# Altium PCB mojo_cnc_shield.pcbdoc
Units mil, origin at the board's own origin, x right, y up, seen from the top; angles counter-clockwise.
Board outline 5990 x 5670 mil, 2 copper layers (Top Layer, Bottom Layer); 90 components, 189 nets, 485 pads, 0 vias.
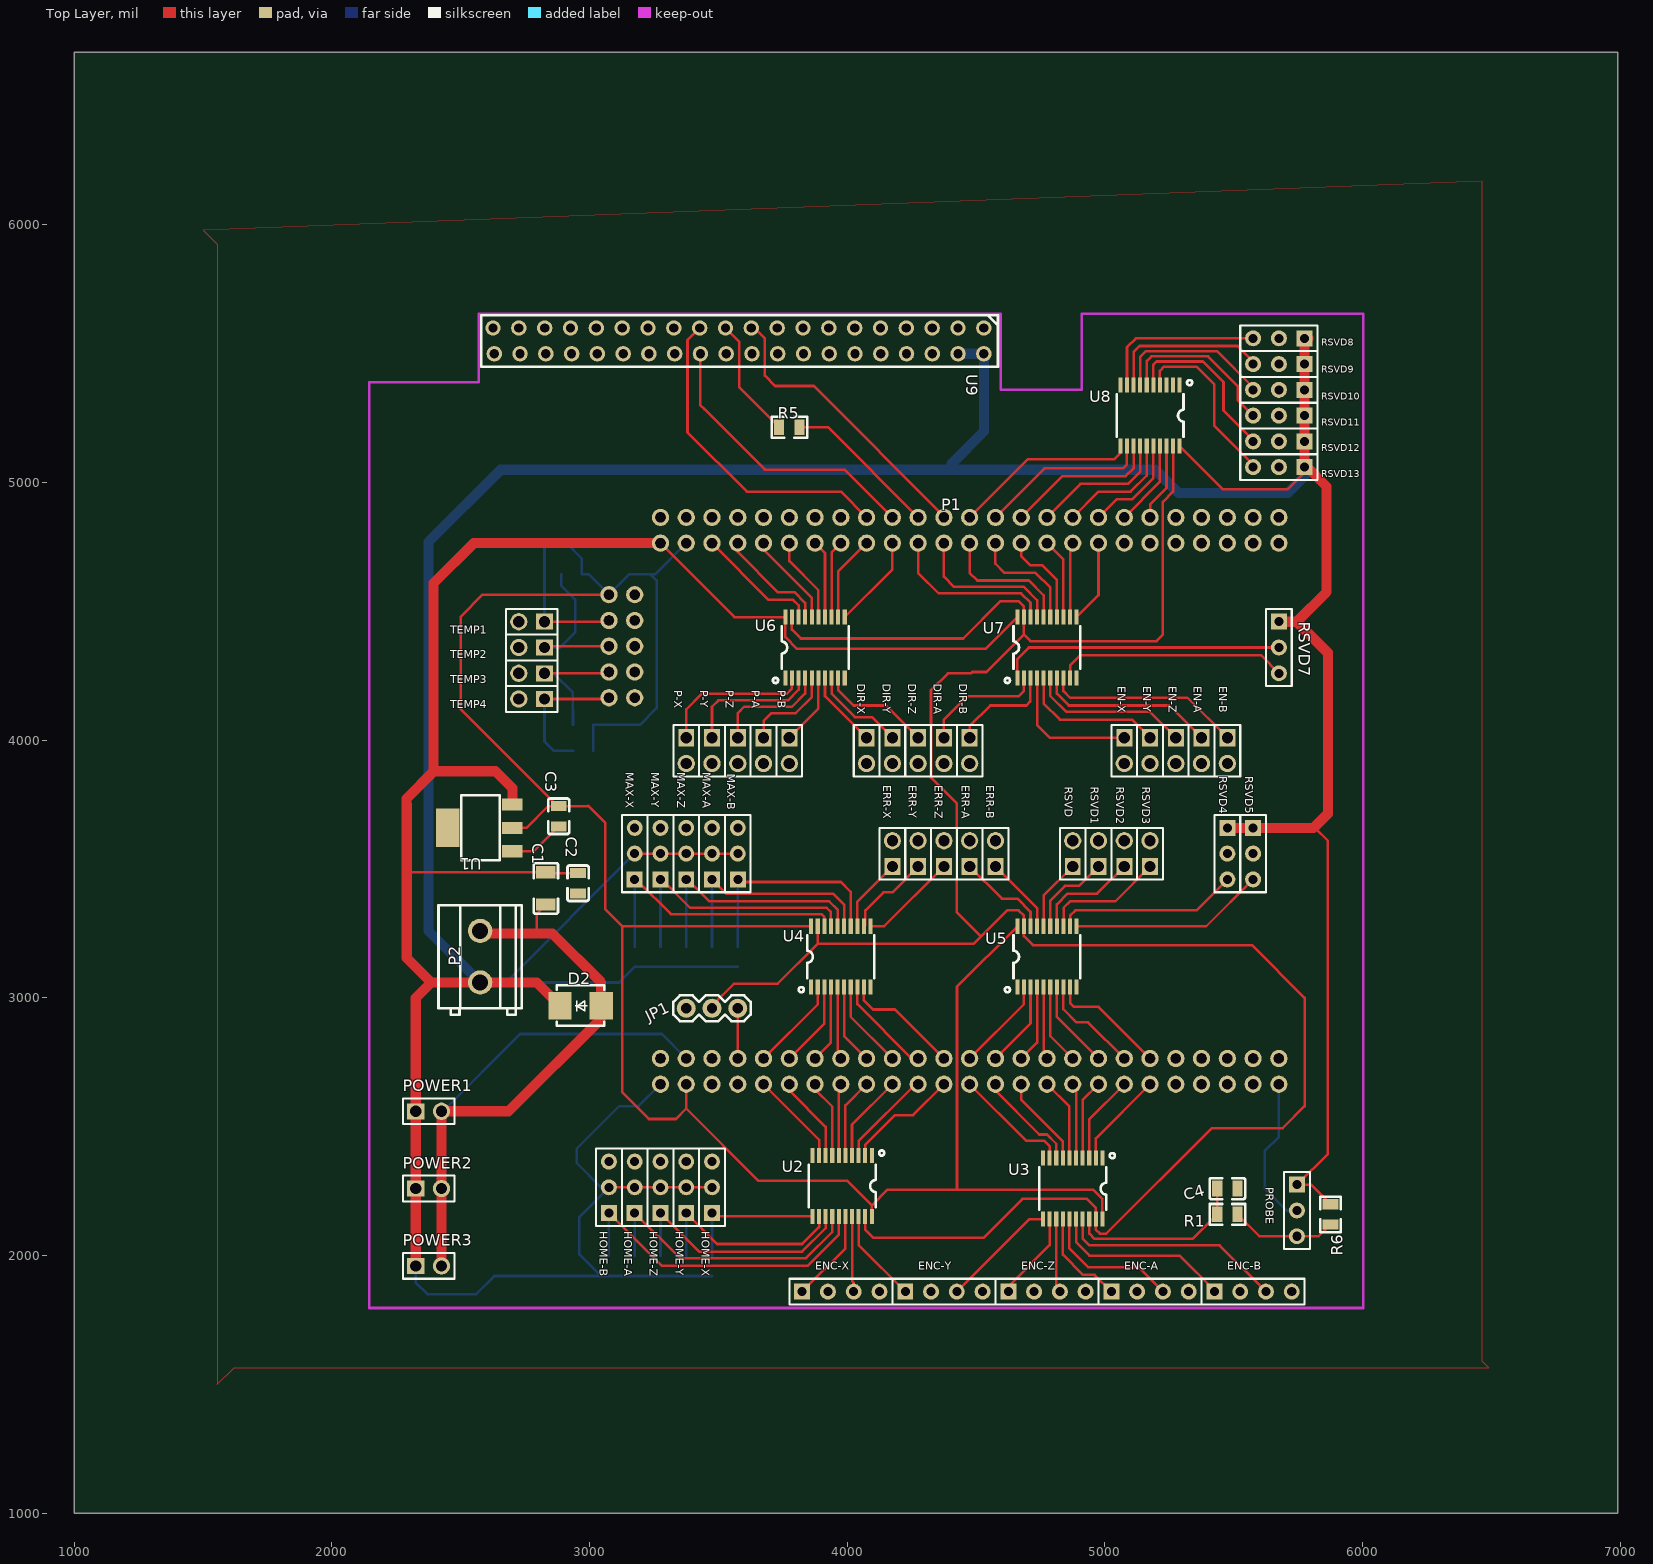
[diagram p0: Top Layer view]
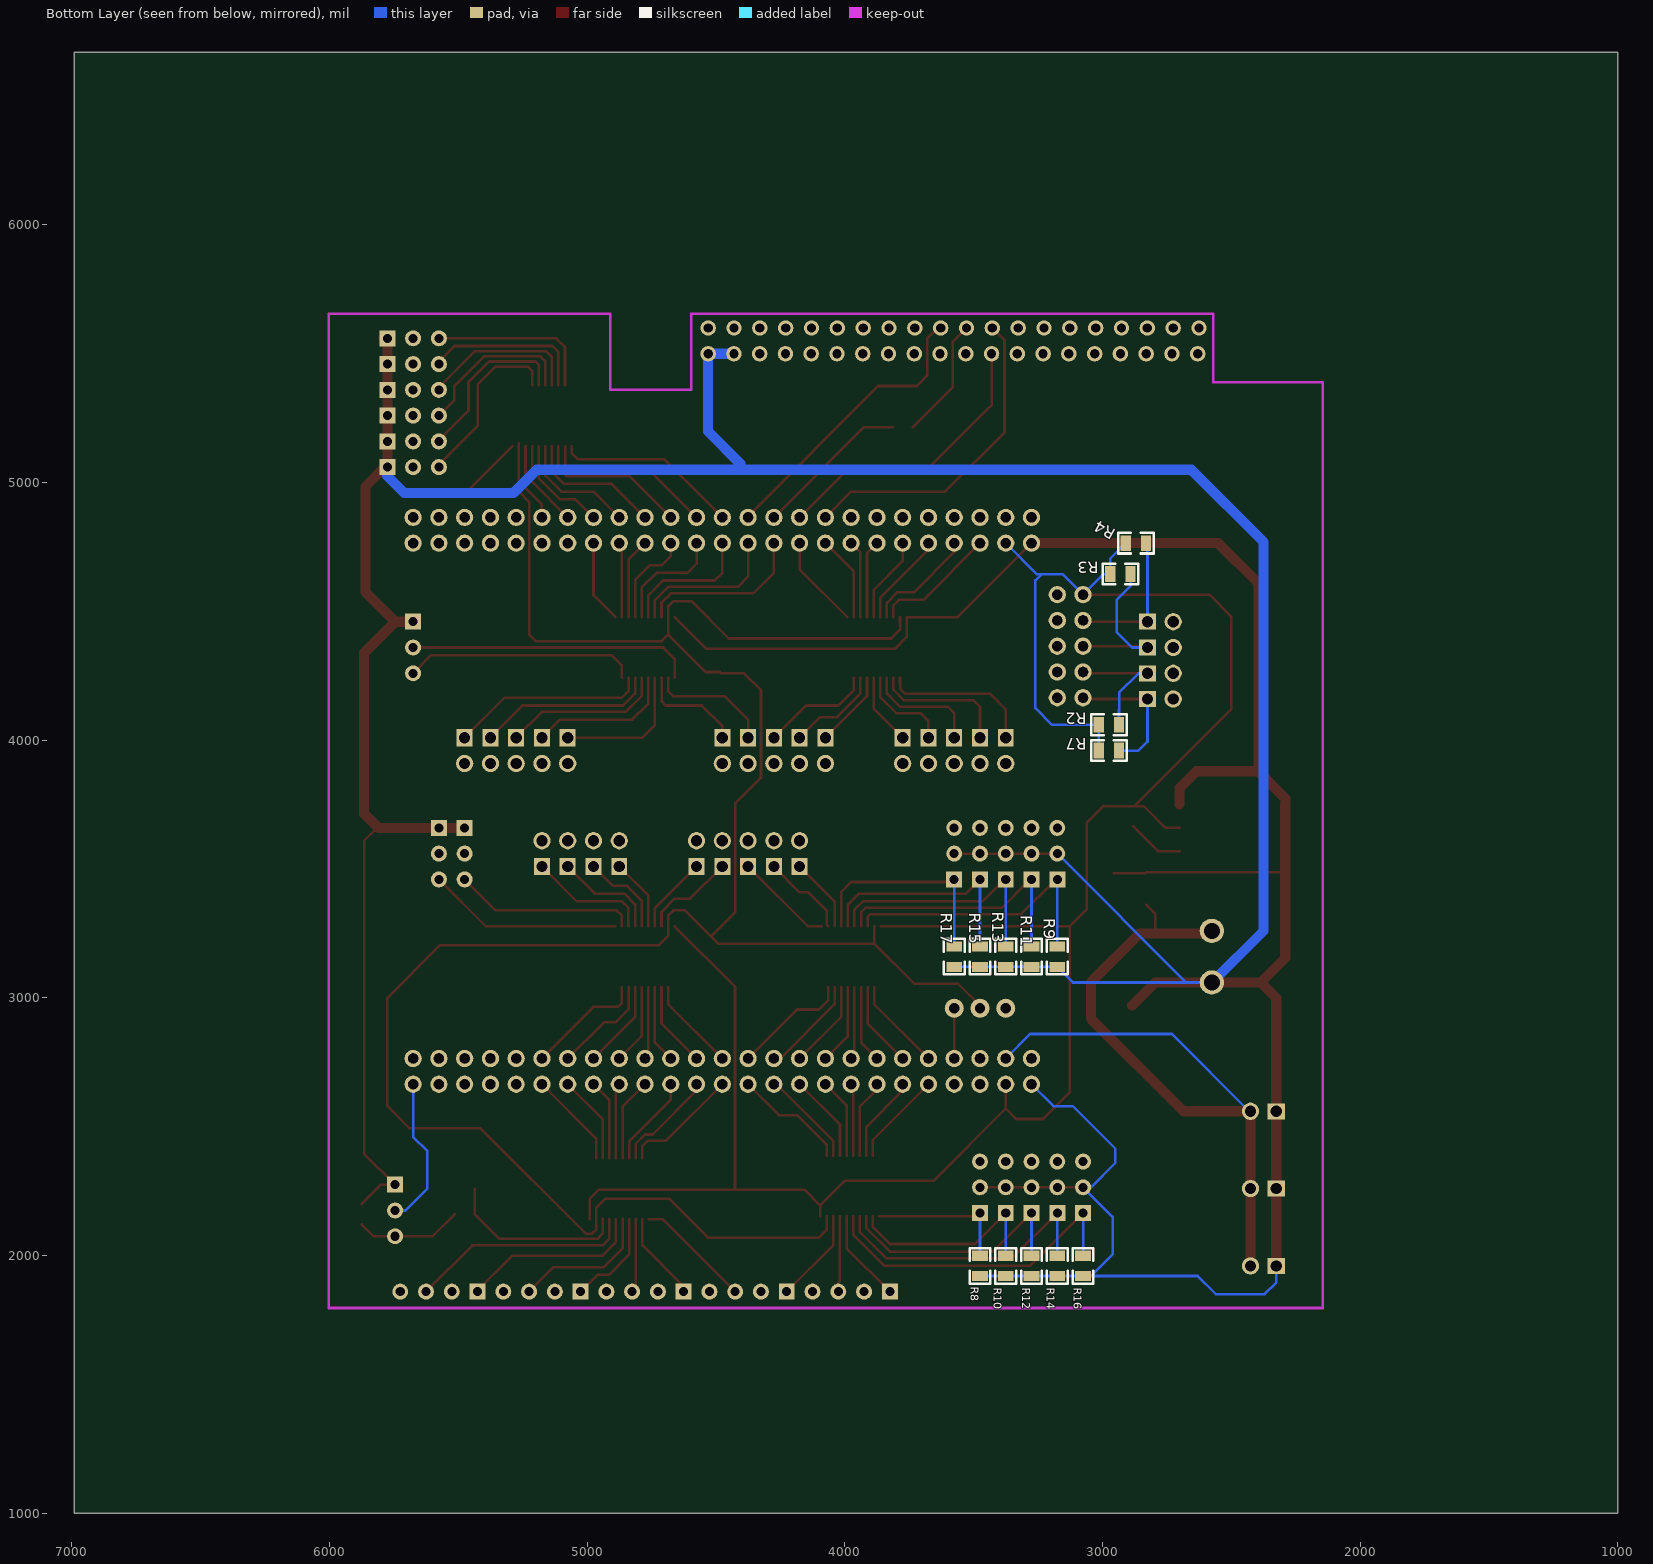
[diagram p1: Bottom Layer view, seen from below]

## Layer stack, top to bottom
Top Layer: signal copper (thickness not stored)
Dielectric: dielectric 12.6, FR-4, Dk 4.8
Bottom Layer: signal copper (thickness not stored)

## Board outline
6990,1000 1000,1000 1000,6670 6990,6670

## Components (designator, comment, footprint, x,y, rotation, side; value= is the part's Value field where it differs from the comment)
C1 "16v/10uF" C1206 2830,3425 r270 top
C2 "0.1uF" C0805 2955,3445 r270 top
C3 "0.1uF" C0805 2880,3705 r270 top
C4 "0.01u" C0805 5475,2260 r0 top
D2 "SMBJ5.0A" SMB_L4.6-W3.6-LS5.3-R-RD 2965,2970 r0 top
DIR-A "5264-2P" HDR-M-2.54_1X2 4375,3960 r270 top
DIR-B "5264-2P" HDR-M-2.54_1X2 4475,3960 r270 top
DIR-X "5264-2P" HDR-M-2.54_1X2 4075,3960 r270 top
DIR-Y "5264-2P" HDR-M-2.54_1X2 4175,3960 r270 top
DIR-Z "5264-2P" HDR-M-2.54_1X2 4275,3960 r270 top
EN-A "5264-2P" HDR-M-2.54_1X2 5375,3960 r270 top
EN-B "5264-2P" HDR-M-2.54_1X2 5475,3960 r270 top
EN-X "5264-2P" HDR-M-2.54_1X2 5075,3960 r270 top
EN-Y "5264-2P" HDR-M-2.54_1X2 5175,3960 r270 top
EN-Z "5264-2P" HDR-M-2.54_1X2 5275,3960 r270 top
ENC-A "5264-04A" HDR-M-2.54_1X4 5175,1860 r0 top
ENC-B "5264-04A" HDR-M-2.54_1X4 5575,1860 r0 top
ENC-X "5264-04A" HDR-M-2.54_1X4 3975,1860 r0 top
ENC-Y "5264-04A" HDR-M-2.54_1X4 4375,1860 r0 top
ENC-Z "5264-04A" HDR-M-2.54_1X4 4775,1860 r0 top
ERR-A "5264-2P" HDR-M-2.54_1X2 4475,3560 r90 top
ERR-B "5264-2P" HDR-M-2.54_1X2 4575,3560 r90 top
ERR-X "5264-2P" HDR-M-2.54_1X2 4175,3560 r90 top
ERR-Y "5264-2P" HDR-M-2.54_1X2 4275,3560 r90 top
ERR-Z "5264-2P" HDR-M-2.54_1X2 4375,3560 r90 top
HOME-A "5264-3P" HDR-M-2.54_1X3 3175,2265 r90 top
HOME-B "5264-3P" HDR-M-2.54_1X3 3075,2265 r90 top
HOME-X "5264-3P" HDR-M-2.54_1X3 3475,2265 r90 top
HOME-Y "5264-3P" HDR-M-2.54_1X3 3375,2265 r90 top
HOME-Z "5264-3P" HDR-M-2.54_1X3 3275,2265 r90 top
JP1 "JUMPER-3PTH" 1X03 3475,2960 r0 top
MAX-A "5264-3P" HDR-M-2.54_1X3 3475,3560 r90 top
MAX-B "5264-3P" HDR-M-2.54_1X3 3575,3560 r90 top
MAX-X "5264-3P" HDR-M-2.54_1X3 3175,3560 r90 top
MAX-Y "5264-3P" HDR-M-2.54_1X3 3275,3560 r90 top
MAX-Z "5264-3P" HDR-M-2.54_1X3 3375,3560 r90 top
P1 "MOJO" MOJO 4375,3765 r0 top
P2 "CONN-TH_2P-P5.08" CONN-TH_2P-P5.08 2575,3160 r90 top
P-A "5264-2P" HDR-M-2.54_1X2 3675,3960 r270 top
P-B "5264-2P" HDR-M-2.54_1X2 3775,3960 r270 top
P-X "5264-2P" HDR-M-2.54_1X2 3375,3960 r270 top
P-Y "5264-2P" HDR-M-2.54_1X2 3475,3960 r270 top
P-Z "5264-2P" HDR-M-2.54_1X2 3575,3960 r270 top
POWER1 "5264-2P" HDR-M-2.54_1X2 2375,2560 r0 top
POWER2 "5264-2P" HDR-M-2.54_1X2 2375,2260 r0 top
POWER3 "5264-2P" HDR-M-2.54_1X2 2375,1960 r0 top
PROBE "5264-3P" HDR-M-2.54_1X3 5745,2175 r270 top
R1 "100Ω" R0805#1 5474.97,2160 r180 top
R2 "4700Ω" R0805#2 2974.97,4060 r180 bottom
R3 "4700Ω" R0805#2 2929.97,4645 r180 bottom
R4 "4700Ω" R0805#2 2869.97,4765 r180 bottom
R5 "80Ω" R0805#1 3775,5215 r180 top
R6 "4700Ω" R0805#1 5874.97,2160 r90 top
R7 "4700Ω" R0805#2 2974.97,3960 r180 bottom
R8 "4700Ω" R0805#2 3474.97,1960 r270 bottom
R9 "4700Ω" R0805#2 3174.97,3160 r270 bottom
R10 "4700Ω" R0805#2 3374.97,1960 r270 bottom
R11 "4700Ω" R0805#2 3274.97,3160 r270 bottom
R12 "4700Ω" R0805#2 3274.97,1960 r270 bottom
R13 "4700Ω" R0805#2 3374.97,3160 r270 bottom
R14 "4700Ω" R0805#2 3174.97,1960 r270 bottom
R15 "4700Ω" R0805#2 3474.97,3160 r270 bottom
R16 "4700Ω" R0805#2 3074.97,1960 r270 bottom
R17 "4700Ω" R0805#2 3574.97,3160 r270 bottom
RSVD "5264-2P" HDR-M-2.54_1X2 4875,3560 r90 top
RSVD1 "5264-2P" HDR-M-2.54_1X2 4975,3560 r90 top
RSVD2 "5264-2P" HDR-M-2.54_1X2 5075,3560 r90 top
RSVD3 "5264-2P" HDR-M-2.54_1X2 5175,3560 r90 top
RSVD4 "5264-3P" HDR-M-2.54_1X3 5475,3560 r270 top
RSVD5 "5264-3P" HDR-M-2.54_1X3 5575,3560 r270 top
RSVD7 "5264-3P" HDR-M-2.54_1X3 5675,4360 r270 top
RSVD8 "5264-3P" HDR-M-2.54_1X3 5675,5560 r180 top
RSVD9 "5264-3P" HDR-M-2.54_1X3 5675,5460 r180 top
RSVD10 "5264-3P" HDR-M-2.54_1X3 5675,5360 r180 top
RSVD11 "5264-3P" HDR-M-2.54_1X3 5675,5260 r180 top
RSVD12 "5264-3P" HDR-M-2.54_1X3 5675,5160 r180 top
RSVD13 "5264-3P" HDR-M-2.54_1X3 5675,5060 r180 top
TEMP1 "5264-2P" HDR-M-2.54_1X2 2775,4460 r180 top
TEMP2 "5264-2P" HDR-M-2.54_1X2 2775,4360 r180 top
TEMP3 "5264-2P" HDR-M-2.54_1X2 2775,4260 r180 top
TEMP4 "5264-2P" HDR-M-2.54_1X2 2775,4160 r180 top
U1 "RC11173.3" SOT-223 2575,3660 r180 top
U2 "SN74LVC245APWR" TSSOP-20_L6.5-W4.4-P0.65-LS6.4-BL 3980,2270 r180 top
U3 "SN74LVC245APWR" TSSOP-20_L6.5-W4.4-P0.65-LS6.4-BL 4875,2260 r180 top
U4 "SN74LVC245APWR" TSSOP-20_L6.5-W4.4-P0.65-LS6.4-BL 3975,3160 r0 top
U5 "SN74LVC245APWR" TSSOP-20_L6.5-W4.4-P0.65-LS6.4-BL 4775,3160 r0 top
U6 "SN74HCT245PWR" TSSOP-20_L6.5-W4.4-P0.65-LS6.4-BL 3875,4360 r0 top
U7 "SN74HCT245PWR" TSSOP-20_L6.5-W4.4-P0.65-LS6.4-BL 4775,4360 r0 top
U8 "SN74HCT245PWR" TSSOP-20_L6.5-W4.4-P0.65-LS6.4-BL 5175,5260 r180 top
U9 "树莓派40pin-IO" 树莓派40PIN-IO 4530,5600 r270 top

## Footprints (in the part's own frame and the unit in brackets; to place one, negate y for a bottom-side part, rotate by r counter-clockwise, add the part's x,y. Pads: shape width x height; smd on the part's side, far side on the other; paste and mask are expansions set on the pad)
1X03 [mil]
  round 74 hole 40: 1(-100,0) 2(0,0) 3(100,0)
  silkscreen extent -150,-50 150,50
C0805 [mm]
  rect 1x1.55 smd: 1(-1,0) 2(1,0)
  silkscreen extent -1.75,-1.04 1.75,1.04
C1206 [mm]
  rect 1.2x1.9 smd: 1(-1.6,0) 2(1.6,0)
  silkscreen extent -2.5,-1.2 2.5,1.2
CONN-TH_2P-P5.08 [mm]
  round 2.4 hole 1.6: 1(-2.54,0) 2(2.54,0)
  silkscreen extent -5.71,-4.1 5.08,4.1
HDR-M-2.54_1X2 [mm]
  rect 1.7x1.575 hole 1.1: 1(-1.27,0)
  round 1.7 hole 1.1: 2(1.27,0)
  silkscreen extent -2.54,-1.27 2.54,1.27
HDR-M-2.54_1X3 [mil]
  rect 62x62 hole 35: 1(-100,0)
  round 62 hole 35: 2(0,0) 3(100,0)
  silkscreen extent -150,-50 150,50
HDR-M-2.54_1X4 [mil]
  rect 62x62 hole 35: 1(-150,0)
  round 62 hole 35: 2(-50,0) 3(50,0) 4(150,0)
  silkscreen extent -200,-50 200,50
MOJO [mil]
  round 66.93 hole 39.36: 1(500.01,1000) 2(500.01,1100) 5(400.01,1000) 6(400.01,1100) 7(300.01,1000) 8(300.01,1100) 9(200.01,1000) 10(200.01,1100) 11(100.01,1000) 12(100.01,1100) 14(0.01,1000) 15(0.01,1100) 16(-99.99,1000) 17(-99.99,1100) 21(-199.99,1000) 22(-199.99,1100) 23(-299.99,1000) 24(-299.99,1100) 26(-399.99,1000) 27(-399.99,1100) 29(-499.99,1000) 30(-499.99,1100) 32(-599.99,1000) 33(-599.99,1100) 34(-699.99,1000) 35(-699.99,1100) 40(-799.99,1000) 41(-799.99,1100) 50(-899.99,1000) 51(-899.99,1100) 57(-799.99,-1100) 58(-799.99,-1000) 66(-699.99,-1100) 67(-699.99,-1000) 74(-599.99,-1100) 75(-599.99,-1000) 78(-499.99,-1100) 79(-499.99,-1000) 80(-399.99,-1100) 81(-399.99,-1000) 82(-299.99,-1100) 83(-299.99,-1000) 84(-199.99,-1100) 85(-199.99,-1000) 87(-99.99,-1100) 88(-99.99,-1000) 92(0.01,-1100) 93(0.01,-1000) 94(100.01,-1100) 95(100.01,-1000) 97(200.01,-1100) 98(200.01,-1000) 99(300.01,-1100) 100(300.01,-1000) 101(400.01,-1100) 102(400.01,-1000) 104(500.01,-1100) 105(500.01,-1000) 111(600.01,-1100) 112(600.01,-1000) 114(700.01,-1100) 115(700.01,-1000) 116(800.01,-1100) 117(800.01,-1000) 118(900.01,-1100) 119(900.01,-1000) 120(1000.01,-1100) 121(1000.01,-1000) 123(1299.99,1000) 124(1299.99,1100) 126(1199.99,1000) 127(1199.99,1100) 131(1099.99,1000) 132(1099.99,1100) 133(1000.01,1000) 134(1000.01,1100) 137(900.01,1000) 138(900.01,1100) 139(800.01,1000) 140(800.01,1100) 141(700.01,1000) 142(700.01,1100) 143(600.01,1000) 144(600.01,1100) +V(-999.99,-1100) +V(-999.99,1000) A0(-1199.99,400) A1(-1299.99,400) A4(-1199.99,500) A5(-1299.99,500) A6(-1199.99,600) A7(-1299.99,600) A8(-1199.99,700) A9(-1299.99,700) AREF(-1299.99,800) DONE(-899.99,-1100) GND(-1199.99,800) GND(-1099.99,-1000) GND(-1099.99,1100) GND(-999.99,-1000) GND(-999.99,1100) GND(1299.99,-1100) RAW(-1099.99,-1100) RAW(-1099.99,1000) RST(1299.99,-1000) SUS(-899.99,-1000) TCK(1199.99,-1100) TDI(1199.99,-1000) TDO(1099.99,-1100) TMS(1099.99,-1000)
R0805#1 [mm]
  rect 1x1.55 smd: 1(-1,0) 2(1,0)
  silkscreen extent -1.75,-1.02 1.75,1.02
R0805#2 [mm]
  rect 1x1.55 smd: 1(1,0) 2(-1,0)
  silkscreen extent -1.75,-1.02 1.75,1.02
SMB_L4.6-W3.6-LS5.3-R-RD [mm]
  rect 2.29x2.72 smd: 1(2.025,0) 2(-2.025,0)
  silkscreen extent -2.35,-2 2.35,2
SOT-223 [mm]
  rect 2x1.2 smd: 1(-3.175,2.3) 2(-3.175,0) 3(-3.175,-2.3)
  rect 2.3x3.8 smd: 4(3.175,0)
  silkscreen extent -1.93,-3.2 1.87,3.2
TSSOP-20_L6.5-W4.4-P0.65-LS6.4-BL [mm]
  rect 0.4x1.494 smd: 1(-2.925,-3.001) 2(-2.275,-3.001) 3(-1.625,-3.001) 4(-0.975,-3.001) 5(-0.325,-3.001) 6(0.324,-3.001) 7(0.975,-3.001) 8(1.625,-3.001) 9(2.275,-3.001) 10(2.925,-3.001) 11(2.925,3.001) 12(2.275,3.001) 13(1.625,3.001) 14(0.975,3.001) 15(0.325,3.001) 16(-0.325,3.001) 17(-0.975,3.001) 18(-1.625,2.996) 19(-2.275,2.996) 20(-2.925,3.001)
  silkscreen extent -4.15,-3.5 3.3,2.1
树莓派40PIN-IO [mil]
  round 60 hole 36: 1(0,0) 2(100,0) 3(0,-100.26) 4(100,-100) 5(0,-200.53) 6(100,-200) 7(0,-300.79) 8(100,-300) 9(0,-401.05) 10(100,-400) 11(0,-501.32) 12(100,-500) 13(0,-601.58) 14(100,-600) 15(0,-701.84) 16(100,-700) 17(0,-802.11) 18(100,-800) 19(0,-902.37) 20(100,-900) 21(0,-1002.63) 22(100,-1000) 23(0,-1102.89) 24(100,-1100) 25(0,-1203.16) 26(100,-1200) 27(0,-1303.42) 28(100,-1300) 29(0,-1403.68) 30(100,-1400) 31(0,-1503.95) 32(100,-1500) 33(0,-1604.21) 34(100,-1600) 35(0,-1704.47) 36(100,-1700) 37(0,-1804.74) 38(100,-1800) 39(0,-1905) 40(100,-1900)
  silkscreen extent -50,-1950 150,55

## Nets (pads, with @x,y where several pads share a name; then routed paths per layer and width w, separated by ;. In a path a pad name is that pad's centre, name@x,y a point inside that pad or via, vN(x,y) a via of type N, cw(c..) or ccw(c..) an arc to the next point about the centre after c; other vN are vias at no path point)
+3V3: C3.1 P1.+V P1.AREF R2.2 R3.2 R4.2 R7.2 U1.2 U2.20 U3.20 U4.20 U5.20 | length 8756
  Top Layer w10: U1.2 2755,3660 2839.37,3744.37 C3.1 2875.63,3744.37 2500,4120 2500,4480 2585,4565 P1.AREF ; C3.1 2995,3745 3060,3680 3060,3345 3126.9,3278.1 ; P1.+V@3375.01,2665 3375.01,2569.99 ; U4.20@3859.8,3278.1 3126.9,3278.1 ; U2.20 4095.16,2195.16 ; 4425.8,2255 4425.8,3044.1 U5.20@4659.8,3278.1 ; U3.20 4990.16,2219.84 4955,2255 4155,2255 4095.16,2195.16 ; 3126.9,3278.1 3126.9,2633.1 3230,2530 3335.02,2530 3375.01,2569.99 ; 3375.01,2569.99 3655,2290 4000.32,2290 4095.16,2195.16
  Bottom Layer w10: R4.2@2909.37,4765 2969.37,4705 2969.37,4645 2995.01,4645 P1.AREF 3155.01,4645 3255.01,4645 P1.+V@3375.01,4765 ; R7.2@3014.37,3960 3014.37,4060 3195,4060 3260,4125 3260,4620 3240.11,4639.89 3240.11,4645
+5V: C1.1 C2.1 D2.2 HOME-A.2 HOME-B.2 HOME-X.2 HOME-Y.2 HOME-Z.2 MAX-A.2 MAX-B.2 MAX-X.2 MAX-Y.2 MAX-Z.2 P1.RAW P2.1 POWER1.1 POWER2.1 POWER3.1 PROBE.1 R6.2 R8.1 R9.1 R10.1 R11.1 R12.1 R13.1 R14.1 R15.1 R16.1 R17.1 RSVD4.1 RSVD5.1 RSVD7.1 RSVD8.1 RSVD9.1 RSVD10.1 RSVD11.1 RSVD12.1 RSVD13.1 U1.3 U6.20 U7.20 U8.20 U9.2 U9.4 | length 22622.4
  Top Layer w10: 2290,3502.56 2304.57,3487.99 C1.1 2833.62,3484.37 C2.1 ; HOME-B.2 HOME-A.2 HOME-Z.2 HOME-Y.2 HOME-X.2 ; MAX-X.2 MAX-Y.2 MAX-Z.2 MAX-A.2 MAX-B.2 ; P1.RAW@3275.01,4765 3561.86,4478.15 U6.20 ; U6.20@3759.8,4478.1 3759.8,4400.2 3805,4355 4536.7,4355 U7.20@4659.8,4478.1 ; U8.20 5457,4975 5710,4975 5770,5035 RSVD13.1@5770,5065 ; 5770,3660 5815,3660 5865,3610 5865,2395 PROBE.1 5799.37,2275 R6.2
  Top Layer w39.37: POWER3.1 POWER2.1 POWER1.1 2325,3000 2385,3060 ; U1.3@2700,3750.5 2700,3815 2635,3880 2394.4,3880 ; D2.2 2795.28,3060 P2.1 2385,3060 ; P1.RAW@3275.01,4765 2550,4765 2394.4,4609.4 2394.4,3880 ; RSVD4.1 RSVD5.1 5810,3660 5865,3715 5865,4340 5745,4460 ; RSVD7.1 5745,4460 ; RSVD13.1@5770,5065 5780,5065 5860,4985 5860,4575 5745,4460 ; RSVD13.1 RSVD12.1 RSVD11.1 RSVD10.1 RSVD9.1 5775,5545 RSVD8.1@5790,5560 ; 2385,3060 2290,3155 2290,3502.56 2290,3740.3 2289.8,3774.2 2394.4,3880
  Bottom Layer w10: POWER3.1 2325,1895 2370,1850 2560,1850 2630.63,1920.63 R16.1 ; P2.1 2675,3060 ; MAX-X.2 2675,3060 ; P1.RAW@3275.01,2665 3190.01,2580 3115,2580 2950,2415 2950,2360 3045,2265 HOME-B.2 2960,2150 2960,2005 3044.37,1920.63 R16.1 ; R8.1 R10.1 R12.1 R14.1 R16.1 ; R17.1 R15.1 R13.1 R11.1 R9.1 3114.37,3060 2675,3060
  Bottom Layer w39.37: P2.1 2375,3260 2375,4770 2655,5050 5195,5050 5285,4960 5710.1,4960 5775.2,5025.6 RSVD13.1 ; 4405.4,5050 4405.2,5073.4 4530,5198.2 4530,5295 U9.2 U9.4 U9.4@4425,5505
A0: P1.A0
A1: P1.A1 R7.1 TEMP4.1 | length 542.2
  Top Layer w10: TEMP4.1 3070.01,4160 P1.A1
  Bottom Layer w10: TEMP4.1 2825,3995 2860,3960 R7.1
A4: P1.A4
A5: P1.A5 R2.1 TEMP3.1 | length 518.1
  Top Layer w10: TEMP3.1 3070.01,4260 P1.A5
  Bottom Layer w10: TEMP3.1 2860,4260 2935,4185 R2.1
A6: P1.A6
A7: P1.A7 R3.1 TEMP2.1 | length 644.5
  Top Layer w10: TEMP2.1 2830,4365 P1.A7
  Bottom Layer w10: TEMP2.1 2885,4360 2945,4420 2945,4545 2890.63,4599.37 R3.1
A8: P1.A8
A9: P1.A9 R4.1 TEMP1.1 | length 559.4
  Top Layer w10: TEMP1.1 3070.01,4460 P1.A9
  Bottom Layer w10: TEMP1.1 2825,4759.37 R4.1
COM_SPICLK: P1.24 U9.23 | length 1256.2
  Top Layer w10: U9.23 3380,5552.9 3380,5195 3610,4965 3975,4965 P1.24
COM_SPICS: P1.22 U9.24 | length 1125.2
  Top Layer w10: U9.24 3430,5300 3445,5285 3680,5050 3990,5050 P1.22
COM_SPIIN: P1.15 U9.19 | length 1141.8
  Top Layer w10: U9.19 3640,5600 3680,5560 3680,5415 3720,5375 3870,5375 P1.15@4380,4865
COM_SPIOUT: R5.2 U9.21 | length 471.3
  Top Layer w10: U9.21 3580,5547.4 3580,5370.63 R5.2
DIR-A: DIR-A.1 U7.2 | length 477.6
  Top Layer w10: DIR-A.1 4375,4080 4465,4170 4665,4170 4685.4,4190.4 U7.2
DIR-B: DIR-B.1 U7.3 | length 411.6
  Top Layer w10: DIR-B.1 4475,4055 4555,4135 4695,4135 4710,4150 4710,4240.82 U7.3@4711.03,4241.85
DIR-X: DIR-X.1 U6.7 | length 298.8
  Top Layer w10: U6.7@3913.38,4241.85 3913.38,4171.62 DIR-X.1
DIR-Y: DIR-Y.1 U6.8 | length 367.7
  Top Layer w10: U6.8 3939,4181 4030,4090 4095,4090 DIR-Y.1
DIR-Z: DIR-Z.1 U6.9 | length 433.7
  Top Layer w10: U6.9@3964.56,4241.85 3964.56,4195.44 4025,4135 4150,4135 DIR-Z.1
ENABLE-A: EN-A.1 U7.7 | length 692.9
  Top Layer w10: U7.7@4813.38,4241.85 4813.38,4181.62 4860,4135 5250,4135 EN-A.1
ENABLE-B: EN-B.1 U7.8 | length 761.8
  Top Layer w10: U7.8@4838.97,4241.85 4838.97,4191.03 4865,4165 5320,4165 EN-B.1
ENABLE-X: EN-X.1 U7.4 | length 541.9
  Top Layer w10: U7.4@4736.62,4241.85 4736.62,4058.38 4785,4010 EN-X.1
ENABLE-Y: EN-Y.1 U7.5 | length 566.9
  Top Layer w10: U7.5@4762.2,4241.85 4762.2,4142.8 4825,4080 5105,4080 EN-Y.1
ENABLE-Z: EN-Z.1 U7.6 | length 624.1
  Top Layer w10: U7.6@4787.74,4241.85 4787.74,4172.26 4850,4110 5175,4110 EN-Z.1
ENCODER-A-A: ENC-A.1 U3.14 | length 386.2
  Top Layer w10: U3.14 4836.6,2003.4 4915,1925 4960,1925 ENC-A.1
ENCODER-A-B: ENC-B.1 U3.16 | length 716.4
  Top Layer w10: U3.16 4887.8,2052.2 4940,2000 5290,2000 5430,1860 ENC-B.1@5435,1860
ENCODER-A-X: ENC-X.1 U2.16 | length 361.3
  Top Layer w10: ENC-X.1 3992.8,2027.8 U2.16
ENCODER-A-Y: ENC-Y.1 U2.18 | length 367
  Top Layer w10: U2.18 4043.98,2041.02 ENC-Y.1
ENCODER-A-Z: ENC-Z.1 U3.12 | length 348.2
  Top Layer w10: ENC-Z.1 4625,1880 4785.4,2040.4 U3.12
ENCODER-B-A: ENC-A.3 U3.15 | length 546.3
  Top Layer w10: U3.15 4862.2,2027.8 4935,1955 5130,1955 ENC-A.3
ENCODER-B-B: ENC-B.3 U3.17 | length 882.4
  Top Layer w10: U3.17 4913.4,2066.6 4940,2040 5445,2040 ENC-B.3 ENC-B.3@5635,1860
ENCODER-B-X: ENC-X.3 U2.17 | length 294.6
  Top Layer w10: U2.17 4020,2150.23 4020,1900 4025,1895 ENC-X.3
ENCODER-B-Y: ENC-Y.3 U3.11 | length 451.5
  Top Layer w10: ENC-Y.3 4706.8,2141.8 U3.11
ENCODER-B-Z: ENC-Z.3 U3.13 | length 287.6
  Top Layer w10: U3.13 4811.03,1873.97 ENC-Z.3
ERR-A: ERR-A.1 U5.18 | length 365
  Top Layer w10: ERR-A.1 4600,3385 4660,3385 4711.03,3333.97 U5.18
ERR-B: ERR-B.1 U5.17 | length 298.8
  Top Layer w10: ERR-B.1 4736.62,3348.38 U5.17
ERR-X: ERR-X.1 U4.13 | length 288.2
  Top Layer w10: U4.13 4038.98,3373.98 ERR-X.1
ERR-Y: ERR-Y.1 U4.12 | length 339.5
  Top Layer w10: U4.12 4070,3283.58 4070,3340 4140,3410 4175,3410 ERR-Y.1
ERR-Z: ERR-Z.1 U4.11 | length 380.9
  Top Layer w10: U4.11 4143.15,3278.15 ERR-Z.1
GND: C1.2 C2.2 C3.2 C4.2 D2.1 DIR-A.2 DIR-B.2 DIR-X.2 DIR-Y.2 DIR-Z.2 EN-A.2 EN-B.2 EN-X.2 EN-Y.2 EN-Z.2 ENC-A.2 ENC-A.4 ENC-B.2 ENC-B.4 ENC-X.2 ENC-X.4 ENC-Y.2 ENC-Y.4 ENC-Z.2 ENC-Z.4 ERR-A.2 ERR-B.2 ERR-X.2 ERR-Y.2 ERR-Z.2 HOME-A.3 HOME-B.3 HOME-X.3 HOME-Y.3 HOME-Z.3 JP1.1 MAX-A.3 MAX-B.3 MAX-X.3 MAX-Y.3 MAX-Z.3 P1.GND P2.2 P-A.2 P-B.2 P-X.2 P-Y.2 P-Z.2 POWER1.2 POWER2.2 POWER3.2 PROBE.2 RSVD1.2 RSVD2.2 RSVD3.2 RSVD4.2 RSVD5.2 RSVD7.2 RSVD8.2 RSVD9.2 RSVD10.2 RSVD11.2 RSVD12.2 RSVD13.2 RSVD.2 TEMP1.2 TEMP2.2 TEMP3.2 TEMP4.2 U1.1 U2.1 U2.10 U3.1 U3.10 U4.1 U4.10 U5.1 U5.10 U6.1 U6.10 U7.1 U7.10 U8.1 U8.10 U9.6 U9.9 U9.14 U9.20 U9.25 U9.30 U9.34 U9.39 | length 5216.5
  Top Layer w10: U1.1 2783.82,3569.45 C3.2 ; 2795,3250 2795,3327 C1.2 ; U7.1 4659.84,4314.84 4705,4360 RSVD7.2
  Top Layer w39.37: POWER3.2 POWER2.2 POWER1.2 2685,2560 3044.7,2919.7 D2.1 3044.7,3060.3 2855,3250 2585,3250 P2.2
  Bottom Layer w10: POWER1.2 2430,2560 2730,2860 3280,2860 P1.GND@3375,2765 ; P1.GND@5675,2665 5675,2460 5620,2405 5620,2260 5705,2175 PROBE.2
HOME-A: HOME-A.1 R14.2 U2.14 | length 1107.1
  Top Layer w10: HOME-A.1 3350,1990 3840,1990 3941.62,2091.62 U2.14
  Bottom Layer w10: R14.2 HOME-A.1
HOME-B: HOME-B.1 R16.2 U2.15 | length 1263
  Top Layer w10: HOME-B.1 3280,1960 3845,1960 3967.2,2082.2 U2.15
  Bottom Layer w10: R16.2 HOME-B.1
HOME-X: HOME-X.1 R8.2 U2.11 | length 560.9
  Top Layer w10: HOME-X.1 3488.16,2151.84 U2.11
  Bottom Layer w10: R8.2 HOME-X.1
HOME-Y: HOME-Y.1 R10.2 U2.12 | length 799.3
  Top Layer w10: HOME-Y.1 3495,2045 3825,2045 3890.44,2110.44 U2.12
  Bottom Layer w10: R10.2 HOME-Y.1
HOME-Z: HOME-Z.1 R12.2 U2.13 | length 952.3
  Top Layer w10: HOME-Z.1 3425,2015 3825,2015 3916.03,2106.03 U2.13
  Bottom Layer w10: R12.2 HOME-Z.1
JP1_3: JP1.3 P1.58 | length 195
  Top Layer w10: P1.58 JP1.3
MAX-A: MAX-A.1 R15.2 U4.15 | length 898
  Top Layer w10: MAX-A.1 3530,3405 3945,3405 3987.8,3362.2 U4.15
  Bottom Layer w10: R15.2 MAX-A.1
MAX-B: MAX-B.1 R17.2 U4.14 | length 833.4
  Top Layer w10: MAX-B.1@3590,3450 3975,3450 4013.4,3411.6 U4.14@4013.4,3278.1
  Bottom Layer w10: R17.2 MAX-B.1
MAX-X: MAX-X.1 R9.2 U4.18 | length 1074
  Top Layer w10: MAX-X.1@3190,3450 3315,3325 3900,3325 3911.03,3313.97 U4.18@3911.03,3277.95
  Bottom Layer w10: R9.2 MAX-X.1
MAX-Y: MAX-Y.1 R11.2 U4.17 | length 1010.8
  Top Layer w10: MAX-Y.1@3290,3450 3390,3350 3920,3350 3936.62,3333.38 U4.17@3936.62,3278.15
  Bottom Layer w10: R11.2 MAX-Y.1
MAX-Z: MAX-Z.1 R13.2 U4.16 | length 941.9
  Top Layer w10: MAX-Z.1@3390,3450 3465,3375 3930,3375 3962.2,3342.8 U4.16@3962.2,3278.15
  Bottom Layer w10: R13.2 MAX-Z.1
OE: JP1.2 U2.19 U3.19 U4.19 U5.19 U6.19 U7.19 U8.19 | length 9270.4
  Top Layer w10: JP1.2@3475,2955 3475,2970 3560,3055 3730,3055 3885,3210 ; U6.19@3785.4,4477.9 3785,4430 3820,4395 4450,4395 4595,4540 4665,4540 4685.4,4519.6 U7.19@4685.4,4477.9 ; U4.19@3885.44,3277.95 3885,3210 ; U2.19 4069.6,2100.4 4100,2070 4530,2070 4680,2220 4930,2220 4965,2185 U3.19 4965,2100 4980,2085 5005,2085 5415,2495 5690,2495 5775,2580 5775,3000 5570,3205 4720,3205 4685.4,3239.6 ; 4518.71,3238.71 4425,3332.42 4425,3755 4325,3855 4325,4195 4390,4260 4480,4260 4485,4265 4540,4265 4685.44,4410.44 U7.19 ; U5.19@4685.4,3277.9 4685.4,3239.6 ; 4685.4,4410.4 4710.9,4385 5200,4385 5225,4410 5225,4925 5265,4965 U8.19@5265,5152 ; 3885,3210 4490,3210 4620,3340 4665,3340 4685.4,3319.6 4685.4,3239.6
P1_2: P1.2 U8.15 | length 469
  Top Layer w10: P1.2 4975,4965 5100,4965 5162.2,5027.2 U8.15
P1_6: P1.6 U8.14 | length 535
  Top Layer w10: P1.6 4905.01,4995 5090,4995 5136.62,5041.62 U8.14
P1_8: P1.8 U8.13 | length 601.6
  Top Layer w10: P1.8 4835.01,5025 5080,5025 5110,5055 5111.03,5055 U8.13
P1_10: P1.10 U8.12 | length 666.7
  Top Layer w10: P1.10 4765,5055 5070,5055 5085,5070 U8.12
P1_12: P1.12 U8.11 | length 715.3
  Top Layer w10: P1.12 4700.01,5090 5035,5090 5059.85,5114.85 U8.11
P1_17: P1.17 R5.1 | length 605.6
  Top Layer w10: R5.1 3925,5215 P1.17
P1_27: P1.27
P1_30: P1.30
P1_33: P1.33
P1_35: P1.35
P1_41: P1.41
P1_51: P1.51
P1_57: P1.57
P1_118: P1.118
P1_119: P1.119
P1_120: P1.120
P1_121: P1.121
P1_123: P1.123
P1_124: P1.124
P1_126: P1.126
P1_127: P1.127
P1_131: P1.131
P1_132: P1.132
P1_133: P1.133
P1_134: P1.134
P1_137: P1.137
P1_138: P1.138
P1_139: P1.139
P1_140: P1.140 U8.18 | length 303.5
  Top Layer w10: P1.140 5175,4915 5239,4979 U8.18
P1_141: P1.141
P1_142: P1.142 U8.17 | length 334.1
  Top Layer w10: P1.142 5213.4,5003.4 U8.17
P1_144: P1.144 U8.16 | length 400.1
  Top Layer w10: P1.144 5045.01,4935 5105,4935 5187.8,5017.8 U8.16
P1_DONE: P1.DONE
P1_RST: P1.RST
P1_SUS: P1.SUS
P1_TCK: P1.TCK
P1_TDI: P1.TDI
P1_TDO: P1.TDO
P1_TMS: P1.TMS
PROBE: PROBE.3 R1.1 R6.1 | length 414.7
  Top Layer w10: R1.1@5514.37,2160 5599.37,2075 PROBE.3 5829.4,2075 R6.1
PULSE-A: P-A.1 U6.5 | length 365
  Top Layer w10: P-A.1 3675,4075 3705,4105 3800,4105 3862.2,4167.2 U6.5@3862.2,4241.85
PULSE-B: P-B.1 U6.6 | length 278.5
  Top Layer w10: P-B.1 3887.74,4122.74 U6.6@3887.74,4241.85
PULSE-X: P-X.1 U6.2 | length 595
  Top Layer w10: P-X.1 3375,4120 3435,4180 3765,4180 3785,4200 U6.2
PULSE-Y: P-Y.1 U6.3 | length 529.2
  Top Layer w10: P-Y.1 3475,4130 3500,4155 3770,4155 3811.03,4196.03 U6.3@3811.03,4241.85
PULSE-Z: P-Z.1 U6.4 | length 448.6
  Top Layer w10: P-Z.1 3575,4105 3600,4130 3785,4130 3836.62,4181.62 U6.4@3836.62,4241.85
RESERVED: RSVD.1 U5.16 | length 278.6
  Top Layer w10: U5.16 4762.2,3397.2 RSVD.1
RESERVED1: RSVD1.1 U5.15 | length 341.7
  Top Layer w10: U5.15@4787.8,3278.1 4787.8,3377.8 4845,3435 4900,3435 RSVD1.1
RESERVED2: RSVD2.1 U5.14 | length 407.6
  Top Layer w10: U5.14@4813.4,3278.1 4813.4,3363.4 4855,3405 4970,3405 RSVD2.1
RESERVED3: RSVD3.1 U5.13 | length 473.6
  Top Layer w10: U5.13@4839,3278.1 4840,3279.2 4840,3350 4865,3375 5040,3375 RSVD3.1
RESERVED4: RSVD4.3 U5.12 | length 710
  Top Layer w10: U5.12 4864.57,3319.57 4885,3340 5355,3340 RSVD4.3
RESERVED5: RSVD5.3 U5.11 | length 760.2
  Top Layer w10: U5.11 5393.15,3278.15 RSVD5.3
RESERVED7: RSVD7.3 U7.9 | length 903.8
  Top Layer w10: U7.9 4864.6,4289.6 4905,4330 5605,4330 RSVD7.3
RESERVED8: RSVD8.3 U8.9 | length 651.2
  Top Layer w10: U8.9 5085.44,5525.44 5120,5560 RSVD8.3
RESERVED9: RSVD9.3 U8.8 | length 636.6
  Top Layer w10: U8.8 5111.03,5506.03 5135,5530 5515,5530 5575,5470 RSVD9.3
RESERVED10: RSVD10.3 U8.7 | length 624.5
  Top Layer w10: U8.7 5136.62,5486.62 5160,5510 5435,5510 5575,5370 RSVD10.3
RESERVED11: RSVD11.3 U8.6 | length 641.7
  Top Layer w10: U8.6 5162.3,5472.3 5180,5490 5400,5490 5515,5375 5515,5320 RSVD11.3
RESERVED12: RSVD12.3 U8.5 | length 667.7
  Top Layer w10: U8.5 5187.8,5457.8 5200,5470 5380,5470 5460,5390 5460,5280 5575,5165 RSVD12.3
RESERVED13: RSVD13.3 U8.4 | length 684.9
  Top Layer w10: U8.4 5213.4,5433.4 5230,5450 5355,5450 5425,5380 5425,5220 5575,5070 RSVD13.3
S$21: 
S$23: 
U2_2: P1.92 U2.2 | length 444.4
  Top Layer w10: U2.2 4069.6,2429.6 4185,2545 4255.01,2545 P1.92
U2_3: P1.87 U2.3 | length 378.5
  Top Layer w10: U2.3 4044,2444 4265,2665 P1.87
U2_4: P1.84 U2.4 | length 341.7
  Top Layer w10: U2.4 4018.39,2508.38 P1.84
U2_5: P1.82 U2.5 | length 310.9
  Top Layer w10: U2.5 3992.8,2582.79 P1.82
U2_6: P1.80 U2.6 | length 280.1
  Top Layer w10: U2.6 3967.26,2657.25 P1.80
U2_7: P1.78 U2.7 | length 304.5
  Top Layer w10: P1.78 3875.01,2644.99 3941.6,2578.4 U2.7
U2_8: P1.74 U2.8 | length 335.3
  Top Layer w10: P1.74 3775.01,2639.99 3916,2499 U2.8
U2_9: P1.66 U2.9 | length 366.1
  Top Layer w10: P1.66 3890.44,2449.57 U2.9
U3_2: P1.116 U3.2 | length 374
  Top Layer w10: U3.2 4964.57,2454.56 P1.116
U3_3: P1.114 U3.3 | length 343.2
  Top Layer w10: U3.3 4938.98,2528.97 P1.114
U3_4: P1.111 U3.4 | length 312.4
  Top Layer w10: U3.4 4913.39,2603.38 P1.111
U3_5: P1.104 U3.5 | length 292.2
  Top Layer w10: P1.104 4887.8,2652.21 U3.5
U3_6: P1.101 U3.6 | length 323
  Top Layer w10: P1.101 4862.26,2577.75 U3.6
U3_7: P1.99 U3.7 | length 353.8
  Top Layer w10: P1.99 4675.01,2604.99 4836.62,2443.38 U3.7
U3_8: P1.97 U3.8 | length 402.2
  Top Layer w10: P1.97 4575.01,2639.99 4745,2470 4775,2470 4811,2434 U3.8
U3_9: P1.94 U3.9 | length 456.4
  Top Layer w10: P1.94 4695.01,2445 4765,2445 4785.44,2424.56 U3.9
U3_18: C4.1 R1.2 U3.18 | length 701.3
  Top Layer w10: U3.18 4938.98,2085 4940,2085 4960,2065 5340.63,2065 R1.2 C4.1
U4_2: P1.67 U4.2 | length 364
  Top Layer w10: P1.67 3885.44,2975.43 U4.2
U4_3: P1.75 U4.3 | length 333.2
  Top Layer w10: P1.75 3911.03,2901.02 U4.3
U4_4: P1.79 U4.4 | length 302.4
  Top Layer w10: P1.79 3936.62,2826.61 U4.4
U4_5: P1.81 U4.5 | length 282.2
  Top Layer w10: U4.5 3962.2,2777.81 P1.81
U4_6: P1.83 U4.6 | length 313
  Top Layer w10: U4.6 3987.74,2852.27 P1.83
U4_7: P1.85 U4.7 | length 343.8
  Top Layer w10: U4.7 4013.38,2926.63 P1.85
U4_8: P1.88 U4.8 | length 389.3
  Top Layer w10: U4.8 4039,2976 4250,2765 P1.88
U4_9: P1.93 U4.9 | length 455.2
  Top Layer w10: U4.9 4064.56,2990.44 4100,2955 4185.01,2955 P1.93
U5_2: P1.95 U5.2 | length 364
  Top Layer w10: P1.95 4685.44,2975.43 U5.2
U5_3: P1.98 U5.3 | length 333.2
  Top Layer w10: P1.98 4711.03,2901.02 U5.3
U5_4: P1.100 U5.4 | length 302.4
  Top Layer w10: P1.100 4736.62,2826.61 U5.4
U5_5: P1.102 U5.5 | length 282.2
  Top Layer w10: U5.5 4762.2,2777.81 P1.102
U5_6: P1.105 U5.6 | length 313
  Top Layer w10: U5.6 4787.74,2852.27 P1.105
U5_7: P1.112 U5.7 | length 343.8
  Top Layer w10: U5.7 4813.38,2926.63 P1.112
U5_8: P1.115 U5.8 | length 401
  Top Layer w10: U5.8 4838.97,2956.03 4890,2905 4935.01,2905 P1.115
U5_9: P1.117 U5.9 | length 461.1
  Top Layer w10: U5.9 4864.56,2980.44 4880,2965 4975.01,2965 P1.117
U6_11: P1.21 U6.11 | length 363.4
  Top Layer w10: U6.11@3990.15,4478.15 4175.01,4663.01 P1.21
U6_12: P1.23 U6.12 | length 332.6
  Top Layer w10: U6.12@3964.57,4478.15 3964.57,4654.56 P1.23
U6_13: P1.26 U6.13 | length 301.8
  Top Layer w10: U6.13@3938.98,4478.15 3938.98,4728.97 P1.26
U6_14: P1.29 U6.14 | length 302.7
  Top Layer w10: P1.29 3913.39,4726.62 U6.14@3913.39,4478.15
U6_15: P1.32 U6.15 | length 333.6
  Top Layer w10: P1.32 3775.01,4694.99 3887.8,4582.2 U6.15@3887.8,4478.15
U6_16: P1.34 U6.16 | length 364.4
  Top Layer w10: P1.34 3675.01,4739.99 3862.2,4552.8 U6.16@3862.2,4478.15
U6_17: P1.40 U6.17 | length 433.3
  Top Layer w10: P1.40 3575.01,4729.99 3730,4575 3795,4575 3836.62,4533.38 U6.17@3836.62,4478.15
U6_18: P1.50 U6.18 | length 481.9
  Top Layer w10: P1.50 3695.01,4545 3790,4545 3811.03,4523.97 U6.18@3811.03,4477.95
U7_11: P1.143 U7.11 | length 322
  Top Layer w10: U7.11@4890.15,4478.15 4975.01,4563.01 P1.143
U7_12: P1.1 U7.12 | length 291.2
  Top Layer w10: U7.12@4864.57,4478.15 4864.57,4754.56 P1.1
U7_13: P1.5 U7.13 | length 313.3
  Top Layer w10: P1.5 4838.98,4701.03 U7.13@4838.98,4478.15
U7_14: P1.7 U7.14 | length 370.5
  Top Layer w10: P1.7 4675.01,4714.99 4710,4680 4755,4680 4813.39,4621.61 U7.14@4813.39,4478.15
U7_15: P1.9 U7.15 | length 445.3
  Top Layer w10: P1.9 4575.01,4684.99 4610,4650 4730,4650 4787.8,4592.2 U7.15@4787.8,4478.15
U7_16: P1.11 U7.16 | length 523
  Top Layer w10: P1.11 4475.01,4649.99 4505,4620 4705,4620 4762.2,4562.8 U7.16@4762.2,4478.15
U7_17: P1.14 U7.17 | length 594.8
  Top Layer w10: P1.14 4375,4635 4415,4595 4685,4595 4736.6,4543.4 U7.17@4736.6,4478.1
U7_18: P1.16 U7.18 | length 655.1
  Top Layer w10: P1.16 4275,4650 4355,4570 4675,4570 4711,4534 U7.18@4711,4477.9
U8_2: U8.2
U8_3: U8.3
U9_1: U9.1
U9_3: U9.3
U9_5: U9.5
U9_7: U9.7
U9_8: U9.8
U9_10: U9.10
U9_11: U9.11
U9_12: U9.12
U9_13: U9.13
U9_15: U9.15
U9_16: U9.16
U9_17: U9.17
U9_18: U9.18
U9_22: U9.22
U9_26: U9.26
U9_27: U9.27
U9_28: U9.28
U9_29: U9.29
U9_31: U9.31
U9_32: U9.32
U9_33: U9.33
U9_35: U9.35
U9_36: U9.36
U9_37: U9.37
U9_38: U9.38
U9_40: U9.40
pads on no net: U1.4

## Polygon pours and split planes (outlines as drawn)
GND on Top Layer (solid): 1500,5980 1555,5925 1555,1500 1620,1565 6490,1565 6465,1590 6465,6170

## Silkscreen, mask and mechanical layers (free items; w line width, h text height)
Document:
  lines w0.1: 3994,3834 3996,3836